# EAGLE board comms_dropper_robot (EAGLE 9.6.2)

Size 83.8 x 79.68 mm. Coordinates in mm from the lower left corner, seen from the top.
Outline: 0,0 83.8,0 83.8,79.68 0,79.68 0,0
Copper layers (1*16): Top 0.035mm / dielectric 1.5mm / Bottom 0.035mm
Design rules "default": minimum track width 6mil, minimum drill 0.35mm, track to track 6mil, track to pad 6mil, pad to pad 6mil, via to via 6mil, smd to smd 6mil, copper to edge 40mil, drill to drill 6mil, minimum pad ring 10mil, minimum via ring 8mil, stop-mask expansion 4mil, vias tented up to drill 0mil, thermal gap 10mil

## Footprints (pad centres in the part's own frame; a part is rotated, then mirrored left to right if it is on the bottom)
22-23-2021 = drill 1 long: 1 -1.27,0; 2 1.27,0
C2.5-3 = drill 0.813 pad 1.6 octagon: 1 -1.27,0; 2 1.27,0
C4111-15 = drill 1.499 long: A 7.62,0; C -7.62,0
SOP-8 = smd 1.3 x 0.7: 1 -2.75,1.905; 2 -2.75,0.635; 3 -2.75,-0.635; 4 -2.75,-1.905; 5 2.75,-1.905; 6 2.75,-0.635; 7 2.75,0.635; 8 2.75,1.905
SOP65P640X120-8N = smd 1.475 x 0.45: 1 -2.938,0.975; 2 -2.938,0.325; 3 -2.938,-0.325; 4 -2.938,-0.975; 5 2.938,-0.975; 6 2.938,-0.325; 7 2.938,0.325; 8 2.938,0.975
LED3MM = drill 0.813 octagon: A -1.27,0; K 1.27,0
TO220BH = drill 1.118 long: D 0,-6.35; G -2.54,-6.35; S 2.54,-6.35 | hole 3.302: 0,11.176
R0805 = smd 1.3 x 1.5: 1 -0.95,0; 2 0.95,0
DTS-6 = drill 1 long: 1 -3.25,2.25; 2 3.25,2.25; 3 -3.25,-2.25; 4 3.25,-2.25
EDG-02 = drill 0.813 long: 1 -1.27,-3.81; 2 1.27,-3.81; 3 1.27,3.81; 4 -1.27,3.81
TEENSY4.0 = drill 0.8: 3.3V@1 7.62,10.16; 3.3V@2 -2.54,-17.78; AGND 7.62,12.7; D0 -7.62,12.7; D1 -7.62,10.16; D2 -7.62,7.62; D3 -7.62,5.08; D4 -7.62,2.54; D5 -7.62,0; D6 -7.62,-2.54; D7 -7.62,-5.08; D8 -7.62,-7.62; D9 -7.62,-10.16; D10 -7.62,-12.7; D11 -7.62,-15.24; D12 -7.62,-17.78; D13/LED 7.62,-17.78; D14/A0 7.62,-15.24; D15/A1 7.62,-12.7; D16/A2 7.62,-10.16; D17/A3 7.62,-7.62; D18/A4 7.62,-5.08; D19/A5 7.62,-2.54; D20/A6 7.62,0; D21/A7 7.62,2.54; D22/A8 7.62,5.08; D23/A9 7.62,7.62; GND@1 -7.62,15.24; GND@2 0,-17.78; ON/OFF 5.08,-17.78; PROGRAM 2.54,-17.78; VBAT -5.08,-17.78; VIN 7.62,15.24; VUSB 5.08,12.7
SOT23-6 = smd 0.4 x 0.55: 1 -0.95,-1.15; 2 0,-1.15; 3 0.95,-1.15 | smd 0.55 x 0.55: 4 0.95,1.15; 5 0,1.15; 6 -0.95,1.15
XBEE = drill 0.8 pad 1.27: 1 -11,9; 2 -11,7; 3 -11,5; 4 -11,3; 5 -11,1; 6 -11,-1; 7 -11,-3; 8 -11,-5; 9 -11,-7; 10 -11,-9; 11 11,-9; 12 11,-7; 13 11,-5; 14 11,-3; 15 11,-1; 16 11,1; 17 11,3; 18 11,5; 19 11,7; 20 11,9

## Placement (x,y rotation side)
BATT  22-23-2021  [22-23-2021]  67.31,68.58 0 top
C1  0.1u  [C2.5-3]  69.85,7.62 90 top
C2  0.1u  [C2.5-3]  66.04,40.64 0 top
C3  10u  [C2.5-3]  66.04,46.99 0 top
C4  1u  [C2.5-3]  66.04,53.34 0 top
D1  1N5908  [C4111-15]  50.8,35.56 180 top
IC1  TP4056  [SOP-8]  68.58,17.78 0 top
IC2  FS8205A  [SOP65P640X120-8N]  73.66,24.13 0 top
LED1  Blue  [LED3MM]  49.53,13.97 0 top
LED2  Red  [LED3MM]  49.53,21.59 0 top
Q1  IRF4905  [TO220BH]  49.53,53.34 0 top
R7  1.2K  [R0805]  59.69,27.94 0 top
R8  1K  [R0805]  59.69,22.86 0 top
R9  1K  [R0805]  59.69,17.78 0 top
R10  1K  [R0805]  59.69,12.7 0 top
R11  100  [R0805]  59.69,7.62 0 top
R12  10K  [R0805]  50.8,6.35 180 top
S1  DTS-6  [DTS-6]  26.67,36.83 270 top
SW1  [EDG-02]  12.7,36.83 270 top
U$1  TEENSY4.0  [TEENSY4.0]  22.86,13.97 90 top
U$2  DW01  [SOT23-6]  77.47,16.51 0 top
XB1  XBEE  [XBEE]  21.59,59.69 0 top

## Library data of the parts
BATT = con-molex; MF: MOLEX; MPN: 22-23-2021; OC_FARNELL: 1462926; OC_NEWARK: 25C3832
C1-C4 = capacitor-wima
D1 = diode
IC1 = TP4056
IC2 = FS8205A; DESCRIPTION: Dual N-Channel Enhancement Mode power MOSFET, TSSOP8; HEIGHT: 1.2mm; MANUFACTURER_NAME: Fortune Semicon; MANUFACTURER_PART_NUMBER: FS8205A
LED1 LED2 = led
Q1 = transistor-power
R7-R12 = rcl; SPICEPREFIX: R
S1 = switch-tact
SW1 = special
U$1 = Teensy4.0
U$2 = DW01
XB1 = maxstream; MPN: XBP24-Z7UIT-004; OC_FARNELL: 1751799; OC_NEWARK: 34R5507

## Nets
BAT+: BATT.1 C3.1 IC1.5 Q1.D R11.2
BAT-: BATT.2 C1.1 IC2.2 IC2.3 U$2.6
CHRG: IC1.7 LED2.K
G1: IC2.4 U$2.1
GND: C2.2 C3.2 C4.2 IC1.1 IC1.3 IC2.6 IC2.7 R7.1 R10.1 R12.1 S1.3 S1.4 U$1.GND@1 U$1.GND@2 XB1.10
N$1: IC2.5 U$2.3
N$2: IC1.2 R7.2
N$3: R10.2 U$2.2
N$4: C1.2 R11.1 U$2.5
N$7: LED1.A R8.1
N$8: LED2.A R9.1
RESET: S1.1 S1.2 XB1.5
STBY: IC1.6 LED1.K
UART_RX: SW1.3 U$1.D0
UART_TX: SW1.4 U$1.D1
V33: U$1.3.3V@1 U$1.3.3V@2 U$1.ON/OFF XB1.1
VSS: C4.1 D1.C Q1.S U$1.VBAT
VUSB: C2.1 D1.A IC1.4 IC1.8 Q1.G R8.2 R9.2 R12.2 U$1.VUSB
XBEE_IN: SW1.1 XB1.3
XBEE_OUT: SW1.2 XB1.2

## Tracks (layer width: path | path; a pad name or v marks a point on that pad's centre or on a via)
BAT+  (4 unrouted)
BAT-  (4 unrouted)
CHRG  (1 unrouted)
G1  (1 unrouted)
GND  (14 unrouted)
N$1  (1 unrouted)
N$2  (1 unrouted)
N$3  (1 unrouted)
N$4  (2 unrouted)
N$7  (1 unrouted)
N$8  (1 unrouted)
RESET  (2 unrouted)
STBY  (1 unrouted)
UART_RX  (1 unrouted)
UART_TX  (1 unrouted)
V33  (3 unrouted)
VSS  (3 unrouted)
VUSB  (8 unrouted)
XBEE_IN  (1 unrouted)
XBEE_OUT  (1 unrouted)